# Altium PCB cs301_YourGroupNumber.PcbDoc
Units mm, origin at the board's own origin, x right, y up, seen from the top; angles counter-clockwise.
Board outline 95.58 x 201.78 mm, 2 copper layers (Top Layer, Bottom Layer); 92 components, 65 nets, 307 pads, 58 vias.
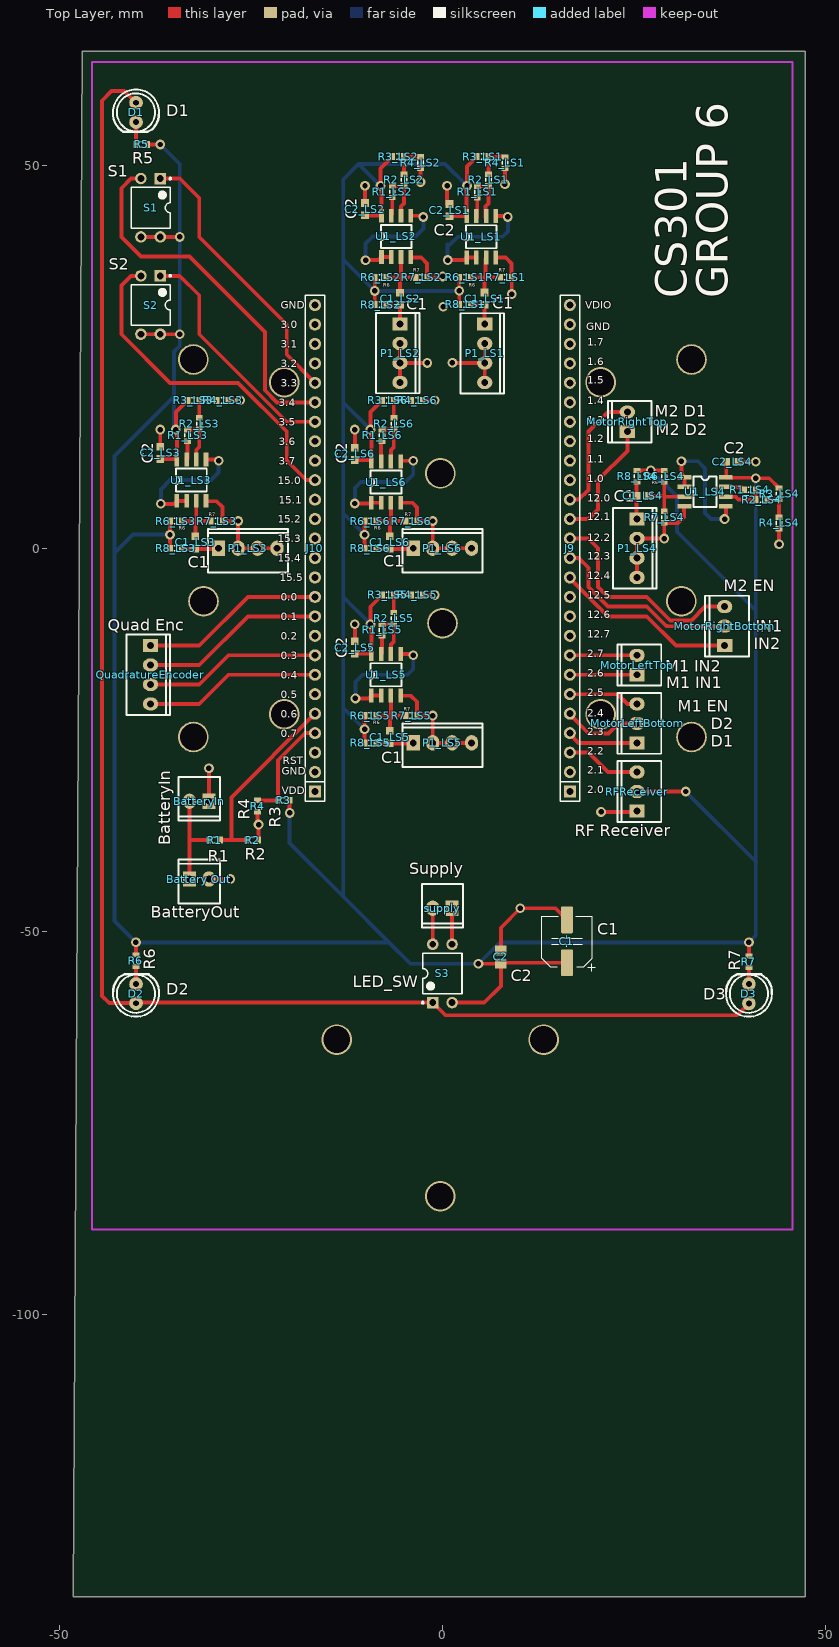
[diagram p0: Top Layer view]
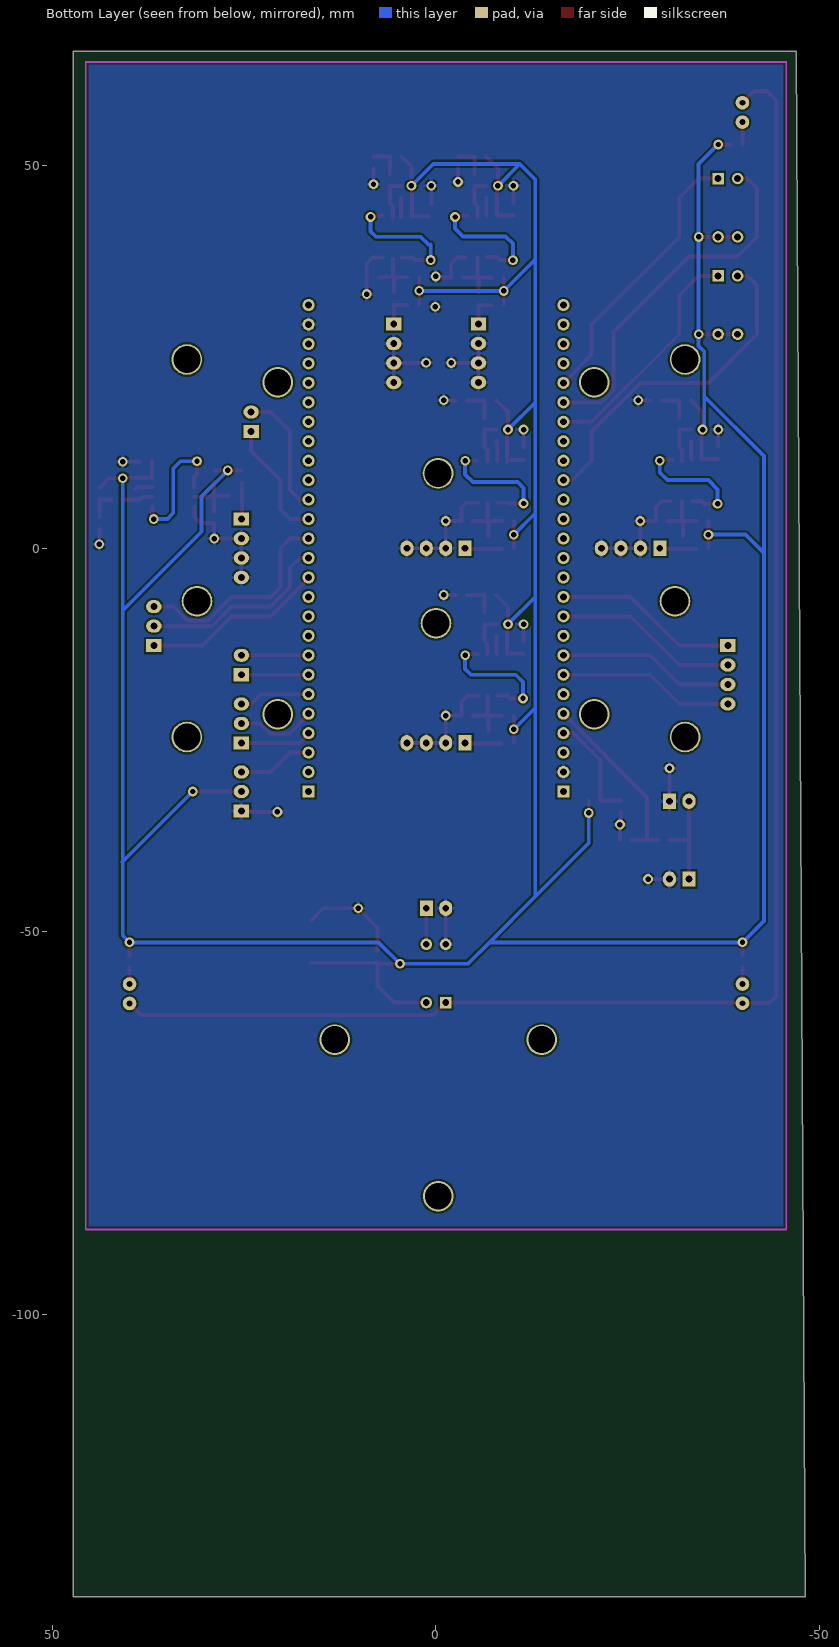
[diagram p1: Bottom Layer view, seen from below]

## Layer stack, top to bottom
Top Solder: solder mask 0.0102, Solder Resist, Dk 3.5
Top Layer: signal copper 0.0356
Dielectric1: dielectric 0.32, FR-4, Dk 4.8
Bottom Layer: signal copper 0.0356
Bottom Solder: solder mask 0.0102, Solder Resist, Dk 3.5

## Board outline
-47.033,64.897 47.371,64.897 47.371,-136.88 27.363,-136.88 -48.214,-136.88

## Design rules (kind name [scope] priority, off if disabled: settings)
Clearance [All] p1: gap=0.254
PolygonConnect [All] p1: connectstyle=Relief reliefconductorwidth=0.508 reliefentries=4 polygonreliefangle="90 Angle" airgapwidth=0.254
RoomDefinition LS6 [InComponentClass('LS6')] p1: confinementstyle=ConfineIn formatcopy=TRUE lockcomponents=FALSE outline 5.461,-3.429 5.461,20.193 -12.319,20.193 -12.319,-3.429
RoomDefinition LS5 [InComponentClass('LS5')] p2: confinementstyle=ConfineIn formatcopy=TRUE lockcomponents=FALSE outline 5.461,-28.829 5.461,-5.207 -12.319,-5.207 -12.319,-28.829
RoomDefinition LS4 [InComponentClass('LS4')] p3: confinementstyle=ConfineIn formatcopy=TRUE lockcomponents=FALSE outline 21.971,-5.461 45.593,-5.461 45.593,12.192 21.971,12.192
RoomDefinition LS3 [InComponentClass('LS3')] p4: confinementstyle=ConfineIn formatcopy=TRUE lockcomponents=FALSE outline -19.939,-3.429 -19.939,20.193 -37.719,20.193 -37.719,-3.429
RoomDefinition LS2 [InComponentClass('LS2')] p5: confinementstyle=ConfineIn formatcopy=TRUE lockcomponents=FALSE outline 0.938,20 0.938,52.004 -11,52.004 -11,20
RoomDefinition LS1 [InComponentClass('LS1')] p6: confinementstyle=ConfineIn formatcopy=TRUE lockcomponents=FALSE outline 9.937,20.008 9.937,52.012 -0.452,52.012 -0.452,20.008
RoomDefinition cs301_YourGroupNumber [InComponentClass('cs301_YourGroupNumber')] p7: confinementstyle=ConfineIn formatcopy=TRUE lockcomponents=FALSE outline -47.625,-91.948 47.371,-91.948 47.371,64.77 -47.625,64.77
RoutingVias [All] p1: holewidth=0.711 width=1.27 viastyle="Through Hole" minholewidth=0.711 minwidth=1.27 maxholewidth=0.711 maxwidth=1.27
SilkToSolderMaskClearance SilkscreenOverComponentPads [IsPad] p1: minsilkscreentomaskgap=0.254 clearancetoexposedcopper=TRUE
SolderMaskExpansion [All] p1: expansion=0.102
UnpouredPolygon [All] p1: allowunpoured=FALSE
Width [All] p1: maxlimit=0.762 minlimit=0.254 preferedwidth=0.254 minimp=50.000000 maximp=50.000000 favimp=50.000000
28 further rules are at their usual default settings.

## Classes and differential pairs
component class LS1: C1_LS1 C2_LS1 P1_LS1 R1_LS1 R2_LS1 R3_LS1 R4_LS1 R6_LS1 R7_LS1 R8_LS1 U1_LS1
component class LS2: C1_LS2 C2_LS2 P1_LS2 R1_LS2 R2_LS2 R3_LS2 R4_LS2 R6_LS2 R7_LS2 R8_LS2 U1_LS2
component class LS3: C1_LS3 C2_LS3 P1_LS3 R1_LS3 R2_LS3 R3_LS3 R4_LS3 R6_LS3 R7_LS3 R8_LS3 U1_LS3
component class LS4: C1_LS4 C2_LS4 P1_LS4 R1_LS4 R2_LS4 R3_LS4 R4_LS4 R6_LS4 R7_LS4 R8_LS4 U1_LS4
component class LS5: C1_LS5 C2_LS5 P1_LS5 R1_LS5 R2_LS5 R3_LS5 R4_LS5 R6_LS5 R7_LS5 R8_LS5 U1_LS5
component class LS6: C1_LS6 C2_LS6 P1_LS6 R1_LS6 R2_LS6 R3_LS6 R4_LS6 R6_LS6 R7_LS6 R8_LS6 U1_LS6
channel class light_sensor: LS1 LS2 LS3 LS4 LS5 LS6

## Components (designator, comment, footprint, x,y, rotation, side; value= is the part's Value field where it differs from the comment)
"Battery Out" "2 Way" ECE-600102STTH -33.02,-43.18 r90 top
BatteryIn "2 Way" ECE-600102STTH -30.48,-33.02 r270 top
C1 "22uF" ECE-CAPAE6.3X5.4SM 16.256,-51.308 r90 top
C1_LS1 "1500pF" ECE-CAPC1608-0603SM 5.492,32.581 r270 top (schematic designator C1)
C1_LS2 "1500pF" ECE-CAPC1608-0603SM -5.539,32.573 r270 top (schematic designator C1)
C1_LS3 "1500pF" ECE-CAPC1608-0603SM -32.258,0.762 r270 top (schematic designator C1)
C1_LS4 "1500pF" ECE-CAPC1608-0603SM 26.162,6.858 r180 top (schematic designator C1)
C1_LS5 "1500pF" ECE-CAPC1608-0603SM -6.858,-24.638 r270 top (schematic designator C1)
C1_LS6 "1500pF" ECE-CAPC1608-0603SM -6.858,0.762 r270 top (schematic designator C1)
C2 "0.1uF" ECE-CAPC2012-0805SM 7.62,-53.34 r90 top
C2_LS1 "100nF" ECE-CAPC1608-0603SM 0.92,44.138 r90 top (schematic designator C2)
C2_LS2 "100nF" ECE-CAPC1608-0603SM -10.111,44.257 r90 top (schematic designator C2)
C2_LS3 "100nF" ECE-CAPC1608-0603SM -36.83,12.446 r90 top (schematic designator C2)
C2_LS4 "100nF" ECE-CAPC1608-0603SM 37.846,11.303 r0 top (schematic designator C2)
C2_LS5 "100nF" ECE-CAPC1608-0603SM -11.43,-12.954 r90 top (schematic designator C2)
C2_LS6 "100nF" ECE-CAPC1608-0603SM -11.43,12.319 r90 top (schematic designator C2)
D1 "LED" LED0.1/5MM#1 -40,55.62 r180 top locked
D2 "LED" LED0.1/5MM#2 -40,-56.88 r0 top locked (schematic designator D4)
D3 "LED" LED0.1/5MM#1 40,-56.88 r0 top locked
J9 "26PIN" SIP26 16.637,-31.75 r90 top locked
J10 "26PIN" SIP26 -16.637,-31.75 r90 top locked
MotorLeftBottom "3 Way" ECE-600103STTH 25.4,-25.4 r180 top
MotorLeftTop "2 Way" ECE-600102STTH 25.4,-16.51 r180 top
MotorRightBottom "3 Way" ECE-600103STTH 36.83,-12.7 r180 top
MotorRightTop "2 Way" ECE-600102STTH 24.13,15.24 r180 top
P1_LS1 "Phototransistor" ECE-600104STTH 5.517,29.254 r0 top (schematic designator P1)
P1_LS2 "Phototransistor" ECE-600104STTH -5.539,29.271 r0 top (schematic designator P1)
P1_LS3 "Phototransistor" ECE-600104STTH -29.21,0 r90 top (schematic designator P1)
P1_LS4 "Phototransistor" ECE-600104STTH 25.4,3.81 r0 top (schematic designator P1)
P1_LS5 "Phototransistor" ECE-600104STTH -3.81,-25.4 r90 top (schematic designator P1)
P1_LS6 "Phototransistor" ECE-600104STTH -3.81,0 r90 top (schematic designator P1)
QuadratureEncoder "4 Way" ECE-600104STTH -38.1,-12.7 r0 top
R1 "100k" J1-0603 -29.718,-38.1 r180 top
R1_LS1 "100k" J1-0603 4.548,46.503 r90 top (schematic designator R1)
R1_LS2 "100k" J1-0603 -6.555,46.543 r90 top (schematic designator R1)
R1_LS3 "100k" J1-0603 -33.274,14.732 r90 top (schematic designator R1)
R1_LS4 "100k" J1-0603 40.132,7.632 r0 top (schematic designator R1)
R1_LS5 "100k" J1-0603 -7.874,-10.668 r90 top (schematic designator R1)
R1_LS6 "100k" J1-0603 -7.874,14.732 r90 top (schematic designator R1)
R2 "100k" J1-0603 -24.765,-38.1 r180 top
R2_LS1 "100k" J1-0603 6,48.087 r90 top (schematic designator R2)
R2_LS2 "100k" J1-0603 -5.031,48.079 r90 top (schematic designator R2)
R2_LS3 "100k" J1-0603 -31.75,16.268 r90 top (schematic designator R2)
R2_LS4 "100k" J1-0603 41.668,6.35 r0 top (schematic designator R2)
R2_LS5 "100k" J1-0603 -6.35,-9.132 r90 top (schematic designator R2)
R2_LS6 "100k" J1-0603 -6.35,16.268 r90 top (schematic designator R2)
R3 "100k" J1-0603 -20.701,-32.893 r0 top
R3_LS1 "100k" J1-0603 5.238,51.123 r180 top (schematic designator R3)
R3_LS2 "100k" J1-0603 -5.793,51.115 r180 top (schematic designator R3)
R3_LS3 "100k" J1-0603 -32.512,19.304 r180 top (schematic designator R3)
R3_LS4 "100k" J1-0603 43.942,7.112 r90 top (schematic designator R3)
R3_LS5 "100k" J1-0603 -7.112,-6.096 r180 top (schematic designator R3)
R3_LS6 "100k" J1-0603 -7.112,19.304 r180 top (schematic designator R3)
R4 "100k" J1-0603 -24.13,-33.655 r90 top
R4_LS1 "100k" J1-0603 8.159,50.323 r90 top (schematic designator R4)
R4_LS2 "100k" J1-0603 -2.872,50.353 r90 top (schematic designator R4)
R4_LS3 "100k" J1-0603 -28.702,19.304 r180 top (schematic designator R4)
R4_LS4 "100k" J1-0603 43.942,3.302 r90 top (schematic designator R4)
R4_LS5 "100k" J1-0603 -3.302,-6.096 r180 top (schematic designator R4)
R4_LS6 "100k" J1-0603 -3.302,19.304 r180 top (schematic designator R4)
R5 "1" J1-0603 -39.243,52.705 r0 top
R6 "1" J1-0603 -40.005,-53.848 r90 top
R6_LS1 "1M" J1-0603 2.952,35.375 r180 top (schematic designator R6)
R6_LS2 "1M" J1-0603 -8.079,35.367 r180 top (schematic designator R6)
R6_LS3 "1M" J1-0603 -34.798,3.556 r180 top (schematic designator R6)
R6_LS4 "1M" J1-0603 28.956,9.398 r90 top (schematic designator R6)
R6_LS5 "1M" J1-0603 -9.398,-21.844 r180 top (schematic designator R6)
R6_LS6 "1M" J1-0603 -9.398,3.556 r180 top (schematic designator R6)
R7 "1" J1-0603 40.005,-53.975 r90 top
R7_LS1 "1M" J1-0603 8.286,35.375 r180 top (schematic designator R7)
R7_LS2 "1M" J1-0603 -2.745,35.367 r180 top (schematic designator R7)
R7_LS3 "1M" J1-0603 -29.464,3.556 r180 top (schematic designator R7)
R7_LS4 "1M" J1-0603 28.956,4.064 r90 top (schematic designator R7)
R7_LS5 "1M" J1-0603 -4.064,-21.844 r180 top (schematic designator R7)
R7_LS6 "1M" J1-0603 -4.064,3.556 r180 top (schematic designator R7)
R8_LS1 "100k" J1-0603 2.952,31.819 r180 top (schematic designator R8)
R8_LS2 "100k" J1-0603 -8.079,31.811 r180 top (schematic designator R8)
R8_LS3 "100k" J1-0603 -34.798,0 r180 top (schematic designator R8)
R8_LS4 "100k" J1-0603 25.4,9.398 r90 top (schematic designator R8)
R8_LS5 "100k" J1-0603 -9.398,-25.4 r180 top (schematic designator R8)
R8_LS6 "100k" J1-0603 -9.398,0 r180 top (schematic designator R8)
RFReceiver "3 Way" ECE-600103STTH 25.4,-34.29 r180 top
S1 "SW DIP-2" DIP-4 -38.1,44.45 r270 top
S2 "SW DIP-2" DIP-4 -38.1,31.75 r270 top
S3 "SW DIP-2" DIP-4 0,-55.5 r90 top
supply "2 Way" ECE-600102STTH 1.27,-46.99 r270 top
U1_LS1 "60MHz Opamp" SO-8 5.056,40.661 r90 top (schematic designator U1)
U1_LS2 "60MHz Opamp" SO-8 -6.047,40.701 r90 top (schematic designator U1)
U1_LS3 "60MHz Opamp" SO-8 -32.766,8.89 r90 top (schematic designator U1)
U1_LS4 "60MHz Opamp" SO-8 34.29,7.378 r0 top (schematic designator U1)
U1_LS5 "60MHz Opamp" SO-8 -7.366,-16.51 r90 top (schematic designator U1)
U1_LS6 "60MHz Opamp" SO-8 -7.366,8.636 r90 top (schematic designator U1)

## Footprints (in the part's own frame and the unit in brackets; to place one, negate y for a bottom-side part, rotate by r counter-clockwise, add the part's x,y. Pads: shape width x height; smd on the part's side, far side on the other; paste and mask are expansions set on the pad)
DIP-4 [mm] "DIP; 4 Leads; Row Spacing 7.62 mm; Pitch 2.54 mm"
  rect 1.5x1.5 hole 0.9: 1(-3.81,1.27)
  round 1.5 hole 0.9: 2(-3.81,-1.27) 3(3.81,-1.27) 4(3.81,1.27)
  silkscreen extent -3.93,-2.55 2.65,2.7, body extent -3.15,-2.5 3.15,2.5, height 5.6
ECE-600102STTH [mm] "Polarised Header 2 way"
  rect 2x1.7 hole 0.9: 1(0,0)
  oval 2x1.7 hole 0.9: 2(0,-2.54)
  silkscreen extent -3.16,-3.96 2.54,1.42, body extent -3.3,-3.64 3.17,1.44, height 7.39
ECE-600103STTH [mm] "Polarised Header 3 way"
  rect 2x1.7 hole 0.9: 1(0,0)
  oval 2x1.7 hole 0.9: 2(0,-2.54) 3(0,-5.08)
  silkscreen extent -3.16,-6.5 2.54,1.42
ECE-600104STTH [mm] "Polarised Header 4 way"
  rect 2x1.7 hole 0.9: 1(0,0)
  oval 2x1.7 hole 0.9: 2(0,-2.54) 3(0,-5.08) 4(0,-7.62)
  silkscreen extent -3.16,-9.04 2.54,1.42
ECE-CAPAE6.3X5.4SM [mm] "Capacitor, polarized, aluminum can; 6.3x5.4mm DxH"
  round 0.508 on Mech15: 0(0,0)
  rrect25% 3.5x1.6 smd: 1(-2.8,0) 2(2.8,0)
  silkscreen extent -3.9,-3.7 3.3,3.3, body extent -3.3,-3.3 3.3,3.3, height 4.23
ECE-CAPC1608-0603SM [mm] "Chip Capacitor, Body 1.6x0.8mm, IPC Medium Density"
  rect 1x1 smd: 1(-0.8,0) 2(0.8,0)
  body extent -0.87,-0.48 0.87,0.48, height 0.85
ECE-CAPC2012-0805SM [mm] "Chip Capacitor, Body 2.0x1.3mm, IPC Medium Density"
  rect 1.3x1.5 smd: 1(-0.85,0) 2(0.85,0)
  body extent -1.1,-0.72 1.1,0.72, height 1.1
J1-0603 [mm] "Chip Resistor, Body 1.6x0.8mm, IPC High Density"
  rect 0.7x0.9 smd: 1(-0.75,0) 2(0.75,0)
  silkscreen extent -0.2,-0.35 0.2,0.35, body extent -0.85,-0.48 0.85,0.48, height 0.9
LED0.1/5MM#1 [mil]
  round 70 hole 30: A(0,0) K(0,-100)
  silkscreen extent -118,-168 118,50
LED0.1/5MM#2 [mil]
  round 70 hole 30: A(0,0) K(0,-98.42)
  silkscreen extent -118,-168 118,50
SIP26 [mil]
  rect 62x62 hole 35.43: 1(0,0)
  round 62 hole 35.43: 2(100,0) 3(200,0) 4(300,0) 5(400,0) 6(500,0) 7(600,0) 8(700,0) 9(800,0) 10(900,0) 11(1000,0) 12(1100,0) 13(1200,0) 14(1300,0) 15(1400,0) 16(1500,0) 17(1600,0) 18(1700,0) 19(1800,0) 20(1900,0) 21(2000,0) 22(2100,0) 23(2200,0) 24(2300,0) 25(2400,0) 26(2500,0)
  silkscreen extent -50,-50 2550,50
SO-8 [mm]
  rect 1.8x0.6 smd: 1(-2.7,1.905) 2(-2.7,0.635) 3(-2.7,-0.635) 4(-2.7,-1.905) 5(2.7,-1.905) 6(2.7,-0.635) 7(2.7,0.635) 8(2.7,1.905)
  silkscreen extent -1.5,-2 1.5,2, body extent -2,-2.5 2,2.5, height 1.8

## Part data
"Battery Out" BatteryIn MotorLeftTop MotorRightTop supply: library part CON000001, "HEADER POLARISED 2WAY TH"
C1: library part "CAP 22uF/35V SM", "Polarized Capacitor (Radial)"
C1_LS1 C1_LS2 C1_LS3 C1_LS4 C1_LS5 C1_LS6: library part CAP000613, "CAP CER 1500pF 50V X7R SM0603"
C2: library part "CAP 0805 SM", "Capacitor"
C2_LS1 C2_LS2 C2_LS3 C2_LS4 C2_LS5 C2_LS6: library part CAP000624, "CAP CER 100nF 25V X7R SM0603"
MotorLeftBottom MotorRightBottom RFReceiver: library part CON000002, "HEADER POLARISED 3WAY TH"
P1_LS1 P1_LS2 P1_LS3 P1_LS4 P1_LS5 P1_LS6 QuadratureEncoder: library part CON000003, "HEADER POLARISED 4WAY TH"
R1 R1_LS1 R1_LS2 R1_LS3 R1_LS4 R1_LS5 R1_LS6 R2 R2_LS1 R2_LS2 R2_LS3 R2_LS4 R2_LS5 R2_LS6 R3 R3_LS1 R3_LS2 R3_LS3 R3_LS4 R3_LS5 R3_LS6 R4 R4_LS1 R4_LS2 R4_LS3 R4_LS4 R4_LS5 R4_LS6 R5 R6 R6_LS1 R6_LS2 R6_LS3 R6_LS4 R6_LS5 R6_LS6 R7 R7_LS1 R7_LS2 R7_LS3 R7_LS4 R7_LS5 R7_LS6 R8_LS1 R8_LS2 R8_LS3 R8_LS4 R8_LS5 R8_LS6: library part Res3, "Resistor"
S1 S2 S3: "DIP Switch, 2 Position, SPST"
U1_LS1 U1_LS2 U1_LS3 U1_LS4 U1_LS5 U1_LS6: library part LT6221

## Free pads (board coordinates)
  round 4 hole 3.5 unplated: 0(-32.512,-24.638) 0(-32.512,24.638) 0(-31.191,-6.909) 0(-0.27,9.779) 0(0,-9.779) 0(31.191,-6.909) 0(32.512,-24.638) 0(32.512,24.638) 1(-20.65,-21.666) 1(-20.65,21.666) 1(20.65,-21.666) 1(20.65,21.666)
  round 4 hole 3.5: 0(-13.792,-64.135) 0(13.208,-64.135) 1(-0.292,-84.582)

## Via types
v1: diameter 1.27, hole 0.711, Top Layer to Bottom Layer, 58 vias

## Nets (pads, with @x,y where several pads share a name; then routed paths per layer and width w, separated by ;. In a path a pad name is that pad's centre, name@x,y a point inside that pad or via, vN(x,y) a via of type N, cw(c..) or ccw(c..) an arc to the next point about the centre after c; other vN are vias at no path point)
GND: "Battery Out.2" BatteryIn.1 C1.2 C2.2 C2_LS1.2 C2_LS2.2 C2_LS3.2 C2_LS4.2 C2_LS5.2 C2_LS6.2 J9.25 J10.2 P1_LS1.2 P1_LS1.3 P1_LS1.4 P1_LS2.2 P1_LS2.3 P1_LS2.4 P1_LS3.2 P1_LS3.3 P1_LS3.4 P1_LS4.2 P1_LS4.3 P1_LS4.4 P1_LS5.2 P1_LS5.3 P1_LS5.4 P1_LS6.2 P1_LS6.3 P1_LS6.4 R2.1 R4.1 R4_LS1.1 R4_LS2.1 R4_LS3.1 R4_LS4.1 R4_LS5.1 R4_LS6.1 R7_LS1.1 R7_LS2.1 R7_LS3.1 R7_LS4.1 R7_LS5.1 R7_LS6.1 RFReceiver.1 S3.4 supply.2 U1_LS1.4 U1_LS2.4 U1_LS3.4 U1_LS4.4 U1_LS5.4 U1_LS6.4 | length 147.6
  Top Layer w0.508: C2_LS3.2 v1(-36.83,15.494) ; U1_LS3.4@-30.607,6.142 -29.486,6.142 -28.714,5.37 R7_LS3.1 v1(-26.67,3.556) P1_LS3.2 P1_LS3.4 ; -30.48,-43.18 v1(-27.686,-43.18) ; BatteryIn.1 v1(-30.48,-28.702) ; R4_LS3.1 v1(-26.416,19.304) ; R4.1 -24.13,-35.941 -24.015,-36.056 R2.1 ; C2_LS5.2 v1(-11.43,-9.906) ; C2_LS6.2 v1(-11.43,15.494) ; C2_LS2.2 v1(-10.111,47.305) ; P1_LS2.4 P1_LS2.3 ; P1_LS2.2 P1_LS2.3 ; U1_LS5.4@-5.461,-19.258 -4.086,-19.258 -3.314,-20.03 R7_LS5.1 v1(-1.27,-21.844) P1_LS5.2 P1_LS5.4 ; U1_LS6.4 -3.904,5.936 -3.314,5.346 R7_LS6.1 v1(-1.27,3.556) P1_LS6.2 P1_LS6.3 P1_LS6.4 ; U1_LS2.4@-3.888,37.953 -2.767,37.953 -1.995,37.181 R7_LS2.1 v1@0.049,35.367 ; v1(-2.872,47.813) R4_LS2.1 ; R4_LS5.1 v1(-1.016,-6.096) ; R4_LS6.1 v1(-1.016,19.304) ; v1(-1.983,24.191) P1_LS2.3 ; S3.4 supply.2 ; C2_LS1.2@0.608,44.938 v1(0.608,47.313) ; v1@1.326,24.174 P1_LS1.3 ; P1_LS1.4 P1_LS1.3 ; P1_LS1.2 P1_LS1.3 ; U1_LS1.4 8.264,37.961 9.036,37.189 R7_LS1.1 9.048,35.363 v1(9.048,33.178) ; C2.2 7.62,-49.53 v1(10.16,-46.99) 14.738,-46.99 C1.2 ; v1(8.159,47.529) R4_LS1.1 ; v1(20.701,-34.417) RFReceiver.1@25.4,-34.417 ; P1_LS4.4 P1_LS4.2 v1(28.956,1.27) R7_LS4.1 30.77,3.314 31.542,4.086 U1_LS4.4@31.542,5.473 ; C2_LS4.2 v1(40.894,11.303) ; v1(43.942,0.508) R4_LS4.1
  other v1: -24.003,-36.068 1.301,24.199 0.1,31.527 0.041,35.48
NetBatteryIn_2: "Battery Out.1" BatteryIn.2 R1.2 | length 12.7
  Top Layer w0.508: -33.02,-43.18 -33.02,-38.1 ; BatteryIn.2 -33.02,-38.1 ; R1.2 -33.02,-38.1
NetC1_LS1_1: C1_LS1.1 R6_LS1.1 R7_LS1.2 U1_LS1.3 | length 8.2
  Top Layer w0.508: R6_LS1.1@3.714,35.375 5.492,35.375 ; C1_LS1.1@5.492,33.431 5.492,35.375 ; U1_LS1.3@5.619,37.755 5.619,35.502 5.492,35.375 ; R7_LS1.2 5.492,35.375
NetC1_LS1_2: C1_LS1.2 P1_LS1.1 R8_LS1.1 | length 4.2
  Top Layer w0.508: R8_LS1.1@3.79,31.731 C1_LS1.2@5.492,31.731 ; P1_LS1.1@5.492,29.279 C1_LS1.2@5.492,31.731 ; C1_LS1.2 C1_LS1.2@5.492,31.731
NetC1_LS2_1: C1_LS2.1 R6_LS2.1 R7_LS2.2 U1_LS2.3 | length 8.5
  Top Layer w0.508: R6_LS2.1@-7.317,35.367 -5.539,35.367 ; C1_LS2.1@-5.539,33.423 -5.539,35.367 ; U1_LS2.3 -5.412,35.494 -5.539,35.367 ; R7_LS2.2 -5.539,35.367
NetC1_LS2_2: C1_LS2.2 P1_LS2.1 R8_LS2.1 | length 4.2
  Top Layer w0.508: R8_LS2.1@-7.241,31.723 C1_LS2.2@-5.539,31.723 ; P1_LS2.1 C1_LS2.2@-5.539,31.723 ; C1_LS2.2 C1_LS2.2@-5.539,31.723
NetC1_LS3_1: C1_LS3.1 R6_LS3.1 R7_LS3.2 U1_LS3.3 | length 8.5
  Top Layer w0.508: R6_LS3.1@-34.036,3.556 -32.258,3.556 ; C1_LS3.1@-32.258,1.612 -32.258,3.556 ; U1_LS3.3 -32.131,3.683 -32.258,3.556 ; R7_LS3.2 -32.258,3.556
NetC1_LS3_2: C1_LS3.2 P1_LS3.1 R8_LS3.1 | length 4.8
  Top Layer w0.508: R8_LS3.1@-33.96,-0.088 -32.258,-0.088 -29.298,-0.088 P1_LS3.1
NetC1_LS4_1: C1_LS4.1 R6_LS4.1 R7_LS4.2 U1_LS4.3 | length 8.5
  Top Layer w0.508: C1_LS4.1@27.012,6.858 28.956,6.858 ; R7_LS4.2 28.956,6.858 ; R6_LS4.1@28.956,8.636 28.956,6.858 ; U1_LS4.3@31.59,6.731 29.083,6.731 28.956,6.858
NetC1_LS4_2: C1_LS4.2 P1_LS4.1 R8_LS4.1 | length 4.8
  Top Layer w0.508: R8_LS4.1@25.312,8.56 25.312,6.858 25.312,3.898 P1_LS4.1
NetC1_LS5_1: C1_LS5.1 R6_LS5.1 R7_LS5.2 U1_LS5.3 | length 8.5
  Top Layer w0.508: R6_LS5.1@-8.636,-21.844 -6.858,-21.844 ; C1_LS5.1@-6.858,-23.788 -6.858,-21.844 ; U1_LS5.3 -6.731,-21.717 -6.858,-21.844 ; R7_LS5.2 -6.858,-21.844
NetC1_LS5_2: C1_LS5.2 P1_LS5.1 R8_LS5.1 | length 4.8
  Top Layer w0.508: R8_LS5.1@-8.56,-25.488 -6.858,-25.488 -3.898,-25.488 P1_LS5.1
NetC1_LS6_1: C1_LS6.1 R6_LS6.1 R7_LS6.2 U1_LS6.3 | length 8.2
  Top Layer w0.508: R6_LS6.1@-8.636,3.556 -6.858,3.556 ; C1_LS6.1@-6.858,1.612 -6.858,3.556 ; U1_LS6.3 -6.731,3.683 -6.858,3.556 ; R7_LS6.2 -6.858,3.556
NetC1_LS6_2: C1_LS6.2 P1_LS6.1 R8_LS6.1 | length 4.8
  Top Layer w0.508: R8_LS6.1@-8.56,-0.088 -6.858,-0.088 -3.898,-0.088 P1_LS6.1
NetD1_A: D1.A R5.1 | length 2.9
  Top Layer w0.508: R5.1@-40,52.712 D1.A
NetD1_K: D1.K D2.K D3.K S3.1 | length 208.5
  Top Layer w0.508: D2.K -43.49,-59.38 -44.45,-58.42 -44.45,58.42 -43.18,59.69 -41.53,59.69 D1.K ; D2.K@-39.93,-59.31 S3.1 0.38,-60.96 38.46,-60.96 D3.K
NetD2_A: D2.A R6.1 | length 2.3
  Top Layer w0.508: D2.A@-40.005,-56.875 R6.1
NetD3_A: D3.A R7.1 | length 2.2
  Top Layer w0.508: D3.A R7.1@40,-54.73
NetJ9_3: J9.3 RFReceiver.3 | length 9.8
  Top Layer w0.508: J9.3 19.05,-26.67 21.59,-29.21 RFReceiver.3
NetJ9_4: J9.4 MotorLeftBottom.1 | length 9.4
  Top Layer w0.508: J9.4 16.637,-24.257 17.78,-25.4 MotorLeftBottom.1
NetJ9_5: J9.5 MotorLeftBottom.2 | length 10.5
  Top Layer w0.508: J9.5 16.637,-21.717 19.094,-24.174 21.689,-24.174 23.003,-22.86 MotorLeftBottom.2
NetJ9_6: J9.6 MotorLeftBottom.3 | length 9.3
  Top Layer w0.508: J9.6 22.86,-19.05 24.13,-20.32 MotorLeftBottom.3
NetJ9_7: J9.7 MotorLeftTop.1 | length 8.8
  Top Layer w0.508: J9.7 MotorLeftTop.1
NetJ9_8: J9.8 MotorLeftTop.2 | length 8.8
  Top Layer w0.508: J9.8 MotorLeftTop.2
NetJ9_12: J9.12 MotorRightBottom.1 | length 23.9
  Top Layer w0.508: J9.12 16.637,-3.937 21.59,-8.89 26.67,-8.89 30.48,-12.7 MotorRightBottom.1
NetJ9_13: J9.13 MotorRightBottom.2 | length 25.4
  Top Layer w0.508: J9.13 17.78,-1.27 19.05,-2.54 19.05,-5.08 21.59,-7.62 26.67,-7.62 29.21,-10.16 29.402,-10.16 29.421,-10.179 36.83,-10.179 MotorRightBottom.2
NetJ9_14: J9.14 MotorRightBottom.3 | length 28.3
  Top Layer w0.508: J9.14 19.05,1.27 20.32,0 20.32,-5.08 21.59,-6.35 26.67,-6.35 29.737,-9.417 32.493,-9.417 34.29,-7.62 MotorRightBottom.3
NetJ9_15: J9.15 MotorRightTop.1 | length 15.9
  Top Layer w0.508: J9.15 19.05,3.81 20.32,5.08 20.32,8.89 24.13,12.7 MotorRightTop.1
NetJ9_16: J9.16 MotorRightTop.2 | length 16.7
  Top Layer w0.508: J9.16 17.78,6.35 19.05,7.62 19.05,15.24 21.59,17.78 MotorRightTop.2
NetJ10_4: J10.4 R3.1 R4.2 | length 14.2
  Top Layer w0.508: R4.2 R3.1@-21.463,-32.905 ; R3.1 -21.451,-27.674 -17.907,-24.13 J10.4
NetJ10_5: J10.5 R1.1 R2.2 | length 24.5
  Top Layer w0.508: R1.1 R2.2 ; -27.559,-38.1 -27.559,-32.512 J10.5
NetJ10_7: J10.7 QuadratureEncoder.4 | length 23
  Top Layer w0.508: QuadratureEncoder.4 -31.75,-20.32 -27.94,-16.51 J10.7
NetJ10_8: J10.8 QuadratureEncoder.3 | length 23
  Top Layer w0.508: QuadratureEncoder.3 -31.75,-17.78 -27.94,-13.97 J10.8
NetJ10_10: J10.10 QuadratureEncoder.2 | length 24.1
  Top Layer w0.508: QuadratureEncoder.2 -31.75,-15.24 -25.4,-8.89 J10.10
NetJ10_11: J10.11 QuadratureEncoder.1 | length 24.1
  Top Layer w0.508: QuadratureEncoder.1 -31.75,-12.7 -25.4,-6.35 J10.11
NetJ10_17: J10.17 S2.2 | length 44.8
  Top Layer w0.508: S2.2 -40.64,35.56 -41.91,34.29 -41.91,27.94 -35.56,21.59 -26.67,21.59 -20.32,15.24 -20.32,11.43 -17.78,8.89 J10.17
NetJ10_20: J10.20 S2.1 | length 31.1
  Top Layer w0.508: S2.1 -34.29,35.56 -31.75,33.02 -31.75,27.94 -20.32,16.51 J10.20
NetJ10_21: J10.21 S1.2 | length 48.1
  Top Layer w0.508: S1.2 -40.64,48.26 -41.91,46.99 -41.91,40.64 -39.37,38.1 -33.02,38.1 -23.158,28.238 -23.158,20.627 -21.581,19.05 J10.21
NetJ10_22: J10.22 S1.1 | length 36.5
  Top Layer w0.508: S1.1 -34.29,48.26 -31.75,45.72 -31.75,40.64 -20.32,29.21 -20.32,25.273 J10.22
NetR1_LS1_1: R1_LS1.1 U1_LS1.7 | length 2.6
  Top Layer w0.508: U1_LS1.7@4.548,43.201 R1_LS1.1
NetR1_LS1_2: R1_LS1.2 R2_LS1.1 U1_LS1.6 | length 5.9
  Top Layer w0.508: R1_LS1.2@4.476,47.301 5.964,47.301 R2_LS1.1 6,45.027 5.619,44.646 U1_LS1.6@5.619,43.155
NetR1_LS2_1: R1_LS2.1 U1_LS2.7 | length 2.4
  Top Layer w0.508: U1_LS2.7 -6.555,43.528 R1_LS2.1
NetR1_LS2_2: R1_LS2.2 R2_LS2.1 U1_LS2.6 | length 5.9
  Top Layer w0.508: R1_LS2.2 -5.067,47.293 R2_LS2.1 -5.031,45.019 -5.412,44.638 U1_LS2.6@-5.412,43.147
NetR1_LS3_1: R1_LS3.1 U1_LS3.7 | length 2.4
  Top Layer w0.508: U1_LS3.7 -33.274,11.717 R1_LS3.1
NetR1_LS3_2: R1_LS3.2 R2_LS3.1 U1_LS3.6 | length 5.9
  Top Layer w0.508: R1_LS3.2 -31.786,15.482 R2_LS3.1 -31.75,13.208 -32.131,12.827 U1_LS3.6@-32.131,11.336
NetR1_LS4_1: R1_LS4.1 U1_LS4.7 | length 2.5
  Top Layer w0.508: U1_LS4.7 39.001,8.013 R1_LS4.1
NetR1_LS4_2: R1_LS4.2 R2_LS4.1 U1_LS4.6 | length 5.4
  Top Layer w0.508: U1_LS4.6@36.99,6.731 38.227,6.731 38.608,6.35 R2_LS4.1 40.882,6.386 R1_LS4.2
NetR1_LS5_1: R1_LS5.1 U1_LS5.7 | length 2.4
  Top Layer w0.508: U1_LS5.7 -7.874,-13.683 R1_LS5.1
NetR1_LS5_2: R1_LS5.2 R2_LS5.1 U1_LS5.6 | length 5.6
  Top Layer w0.508: R1_LS5.2 -6.386,-9.918 R2_LS5.1 -6.35,-12.192 -6.731,-12.573 U1_LS5.6
NetR1_LS6_1: R1_LS6.1 U1_LS6.7 | length 2.7
  Top Layer w0.508: U1_LS6.7 -8.001,13.855 R1_LS6.1
NetR1_LS6_2: R1_LS6.2 R2_LS6.1 U1_LS6.6 | length 5.9
  Top Layer w0.508: R1_LS6.2 -6.386,15.482 R2_LS6.1 -6.35,13.208 -6.731,12.827 U1_LS6.6
NetR2_LS1_2: R2_LS1.2 R3_LS1.1 R4_LS1.2 | length 4.4
  Top Layer w0.508: R3_LS1.1@5.988,51.123 R4_LS1.2@8.159,51.123 ; R2_LS1.2 R3_LS1.1@6,51.111
NetR2_LS2_2: R2_LS2.2 R3_LS2.1 R4_LS2.2 | length 4.4
  Top Layer w0.508: R3_LS2.1 R4_LS2.2@-2.872,51.115 ; R2_LS2.2 R3_LS2.1@-5.031,51.103
NetR2_LS3_2: R2_LS3.2 R3_LS3.1 R4_LS3.2 | length 4.6
  Top Layer w0.508: R3_LS3.1 R4_LS3.2 ; R2_LS3.2 R3_LS3.1@-31.75,19.292
NetR2_LS4_2: R2_LS4.2 R3_LS4.1 R4_LS4.2 | length 3.8
  Top Layer w0.508: R2_LS4.2 R3_LS4.1@43.942,6.35 ; R4_LS4.2 R3_LS4.1@43.942,6.35 ; R3_LS4.1 R3_LS4.1@43.942,6.35
NetR2_LS5_2: R2_LS5.2 R3_LS5.1 R4_LS5.2 | length 4.6
  Top Layer w0.508: R3_LS5.1 R4_LS5.2 ; R2_LS5.2 R3_LS5.1@-6.35,-6.108
NetR2_LS6_2: R2_LS6.2 R3_LS6.1 R4_LS6.2 | length 4.6
  Top Layer w0.508: R3_LS6.1 R4_LS6.2 ; R2_LS6.2 R3_LS6.1@-6.35,19.292
NetS3_3: S3.3 supply.1 | length 4.7
  Top Layer w0.508: S3.3 supply.1
NetU1_LS1_1: U1_LS1.1 U1_LS1.2 U1_LS1.5 | length 17.4
  Top Layer w0.508: v1@0.992,37.613 2.803,37.613 U1_LS1.1 U1_LS1.2 ; U1_LS1.5 8.428,43.361 v1(8.54,43.249)
  Bottom Layer w0.508: v1(0.68,37.613) 0.68,39.645 ; 0.992,39.645 2.008,40.661 7.85,40.661 8.54,41.351 v1(8.54,43.249)
NetU1_LS2_1: U1_LS2.1 U1_LS2.2 U1_LS2.5 | length 17
  Top Layer w0.508: v1(-10.039,37.605) -8.348,37.605 U1_LS2.1 ; U1_LS2.1@-7.698,38.001 U1_LS2.2 ; U1_LS2.5 -2.651,43.401 v1(-2.491,43.241)
  Bottom Layer w0.508: v1(-10.039,37.605) -10.039,39.757 -9.095,40.701 -3.507,40.701 -2.491,41.717 v1(-2.491,43.241)
NetU1_LS3_1: U1_LS3.1 U1_LS3.2 U1_LS3.5 | length 17.1
  Top Layer w0.508: v1(-36.758,5.794) -35.067,5.794 U1_LS3.1 U1_LS3.2 ; U1_LS3.5 -29.37,11.59 v1(-29.21,11.43)
  Bottom Layer w0.508: v1(-36.758,5.794) -36.758,7.692 -35.56,8.89 -30.226,8.89 -29.21,9.906 v1(-29.21,11.43)
NetU1_LS4_1: U1_LS4.1 U1_LS4.2 U1_LS4.5 | length 17.4
  Top Layer w0.508: v1(31.194,11.358) 31.194,9.679 U1_LS4.1 U1_LS4.2 ; v1(36.83,3.81) 36.99,3.97 U1_LS4.5
  Bottom Layer w0.508: v1(31.194,11.358) 33.358,11.358 34.29,10.426 34.29,4.584 35.064,3.81 v1(36.83,3.81)
NetU1_LS5_1: U1_LS5.1 U1_LS5.2 U1_LS5.5 | length 17.4
  Top Layer w0.508: v1(-11.358,-19.606) -9.667,-19.606 U1_LS5.1 U1_LS5.2 ; U1_LS5.5 -3.97,-13.81 v1(-3.81,-13.97)
  Bottom Layer w0.508: v1(-11.358,-19.606) -11.358,-17.454 -10.414,-16.51 -4.572,-16.51 -3.81,-15.748 v1(-3.81,-13.97)
NetU1_LS6_1: U1_LS6.1 U1_LS6.2 U1_LS6.5 | length 17.2
  Top Layer w0.508: v1(-11.43,5.842) -9.365,5.842 U1_LS6.1 U1_LS6.2 ; U1_LS6.5@-5.367,11.43 v1(-3.81,11.43)
  Bottom Layer w0.508: v1(-11.43,5.842) -11.43,7.874 -10.668,8.636 -4.826,8.636 -3.81,9.652 v1(-3.81,11.43)
VCC: C1.1 C2.1 C2_LS1.1 C2_LS2.1 C2_LS3.1 C2_LS4.1 C2_LS5.1 C2_LS6.1 R3.2 R3_LS1.2 R3_LS2.2 R3_LS3.2 R3_LS4.2 R3_LS5.2 R3_LS6.2 R5.2 R6.2 R6_LS1.2 R6_LS2.2 R6_LS3.2 R6_LS4.2 R6_LS5.2 R6_LS6.2 R7.2 R8_LS1.2 R8_LS2.2 R8_LS3.2 R8_LS4.2 R8_LS5.2 R8_LS6.2 RFReceiver.2 S1.3 S1.4 S2.3 S2.4 S3.2 U1_LS1.8 U1_LS2.8 U1_LS3.8 U1_LS4.8 U1_LS5.8 U1_LS6.8 | length 604.4
  Top Layer w0.508: R6.2 v1(-40.005,-51.435) ; S2.3 S2.4 v1(-34.29,27.94) ; S1.3 S1.4 v1(-34.29,40.64) ; R5.2 v1(-36.83,52.705) ; C2_LS3.1 -34.727,11.646 U1_LS3.8 -34.671,15.367 v1(-34.798,15.494) -34.798,17.768 R3_LS3.2 ; R8_LS3.2@-35.56,0.012 v1(-35.56,1.778) R6_LS3.2@-35.56,3.544 ; v1(-19.939,-34.544) R3.2@-19.939,-32.905 ; C2_LS5.1 -9.327,-13.754 U1_LS5.8 -9.271,-10.033 v1(-9.398,-9.906) -9.398,-7.632 R3_LS5.2 ; C2_LS6.1 -9.454,11.519 U1_LS6.8 -9.271,15.367 v1(-9.398,15.494) -9.398,17.768 R3_LS6.2 ; R8_LS5.2@-10.16,-25.388 v1(-10.16,-23.622) R6_LS5.2@-10.16,-21.856 ; R8_LS6.2@-10.16,0.012 v1(-10.16,1.778) R6_LS6.2@-10.16,3.544 ; C2_LS2.1 -8.008,43.457 U1_LS2.8 -7.952,47.178 v1(-8.079,47.305) -8.079,49.579 R3_LS2.2 ; R8_LS2.2@-8.841,31.823 v1(-8.841,33.589) R6_LS2.2@-8.841,35.355 ; C2_LS1.1 3.128,43.338 U1_LS1.8 3.151,47.258 v1(3.206,47.313) 3.206,49.841 R3_LS1.2 ; S3.2 5.46,-59.31 7.62,-57.15 C2.1 ; R8_LS1.2@2.19,31.831 v1(2.19,33.597) R6_LS1.2@2.19,35.363 ; v1(4.699,-54.229) C2.1@7.581,-54.229 ; C2.1@7.702,-54.108 C1.1 ; RFReceiver.2 v1(31.75,-31.75) ; R8_LS4.2@25.412,10.16 v1(27.178,10.16) R6_LS4.2@28.944,10.16 ; U1_LS4.8@36.99,9.199 40.839,9.199 v1(40.894,9.144) 42.66,9.144 R3_LS4.2 ; U1_LS4.8@37.046,9.339 C2_LS4.1 ; R7.2 v1(40.005,-51.435)
  Bottom Layer w0.508: v1(-36.83,52.705) -34.29,50.165 v1(-34.29,40.64) v1(-34.29,27.94) -34.29,26.407 -35.02,25.677 -35.02,19.812 ; v1(-35.56,1.778) -40.386,1.778 -42.799,-0.635 ; v1(-34.798,15.494) -35.02,15.716 -35.02,19.812 ; v1(-19.939,-34.544) -19.939,-38.481 -12.954,-45.466 ; v1(-10.16,-23.622) -12.954,-20.828 ; v1(-10.16,1.778) -12.954,4.572 ; v1(-9.398,-9.906) -12.954,-6.35 ; v1(-9.398,15.494) -12.954,19.05 ; v1(-8.841,33.589) -12.954,37.702 ; v1@-8.833,33.597 v1(2.19,33.597) ; v1(-8.079,47.305) -10.939,50.165 ; v1(3.206,47.313) 0.354,50.165 -10.939,50.165 ; v1(27.178,10.16) 30.607,6.731 30.607,2.159 40.894,-8.128 ; v1(31.75,-31.75) 40.957,-40.957 ; v1(40.894,9.144) 40.894,-8.128 ; -42.799,-0.635 -42.799,12.033 -35.02,19.812 ; -42.799,-0.635 -42.799,-48.641 v1(-40.005,-51.435) -6.985,-51.435 ; -12.954,-45.466 -6.985,-51.435 ; -12.954,-45.466 -12.954,-20.828 ; -12.954,-20.828 -12.954,-6.35 ; -12.954,-6.35 -12.954,4.572 ; -12.954,4.572 -12.954,19.05 ; -12.954,19.05 -12.954,37.702 ; -12.954,37.702 -12.954,48.15 -10.939,50.165 ; -6.985,-51.435 -4.191,-54.229 v1(4.699,-54.229) 7.493,-51.435 v1(40.005,-51.435) 40.894,-50.546 40.894,-8.128
pads on no net: C1.0 J9.1 J9.2 J9.9 J9.10 J9.11 J9.17 J9.18 J9.19 J9.20 J9.21 J9.22 J9.23 J9.24 J9.26 J10.1 J10.3 J10.6 J10.9 J10.12 J10.13 J10.14 J10.15 J10.16 J10.18 J10.19 J10.23 J10.24 J10.25 J10.26

## Polygon pours and split planes (outlines as drawn)
GND on Bottom Layer "Top Layer-No Net" (solid, remove dead copper, pour order 2): -45.974,63.754 45.593,63.754 45.593,-88.773 -45.974,-88.773

## Keep-outs
Keep-Out Layer:
  lines w0.254: -45.72,-88.9 45.72,-88.9 45.72,63.5 -45.72,63.5 -45.72,-88.9

## Silkscreen, mask and mechanical layers (free items; w line width, h text height)
Top Overlay:
  text "D1" at -36.068,56.388 h1.52
  text "R5" at -40.513,50.165 h1.52
  text "S1" at -43.688,48.514 h1.52
  text "C2" at -11.176,42.926 h1.52 r90
  text "C2" at -1.143,40.767 h1.52
  text "S2" at -43.561,36.322 h1.52
  text "R7" at -3.81,36.068 h0.5
  text "R7" at 7.366,36.068 h0.5
  text "R6" at -7.747,34.163 h0.5
  text "R6" at 3.429,34.163 h0.5
  text "CS301" at 33.274,32.639 h7 r90
  text "GROUP 6" at 38.608,32.639 h7 r90
  text "GND" at -21.082,31.242 h1.02
  text "C1" at 6.477,31.242 h1.52
  text "VDIO" at 18.669,31.242 h1.02
  text "C1" at -4.699,31.115 h1.52
  text "3.0" at -21.082,28.702 h1.02
  text "GND" at 18.796,28.448 h1.02
  text "1.7" at 18.923,26.416 h1.02
  text "3.1" at -21.082,26.162 h1.02
  text "1.6" at 18.923,23.876 h1.02
  text "3.2" at -21.082,23.622 h1.02
  text "1.5" at 18.923,21.463 h1.02
  text "3.3" at -21.082,21.082 h1.02
  text "1.4" at 18.923,18.796 h1.02
  text "3.4" at -21.353,18.542 h1.02
  text "M2 D1" at 27.686,17.145 h1.52
  text "1.3" at 18.923,16.256 h1.02
  text "3.5" at -21.353,16.002 h1.02
  text "M2 D2" at 27.813,14.732 h1.52
  text "1.2" at 18.923,13.843 h1.02
  text "3.6" at -21.353,13.462 h1.02
  text "C2" at 36.703,12.319 h1.52
  text "1.1" at 18.923,11.176 h1.02
  text "C2" at -37.719,11.049 h1.52 r90
  text "C2" at -12.446,11.049 h1.52 r90
  text "3.7" at -21.353,10.922 h1.02
  text "1.0" at 18.923,8.636 h1.02
  text "15.0" at -21.48,8.382 h1.02
  text "R6" at 27.305,8.382 h0.5
  text "12.0" at 18.923,6.096 h1.02
  text "C1" at 22.352,6.096 h1.52
  text "15.1" at -21.353,5.842 h1.02
  text "R7" at -30.48,4.191 h0.5
  text "R7" at -4.953,4.191 h0.5
  text "R7" at 29.845,4.064 h0.5
  text "12.1" at 18.923,3.683 h1.02
  text "15.2" at -21.48,3.302 h1.02
  text "R6" at -34.417,2.413 h0.5
  text "R6" at -8.89,2.413 h0.5
  text "12.2" at 18.923,0.889 h1.02
  text "15.3" at -21.48,0.762 h1.02
  text "12.3" at 18.923,-1.524 h1.02
  text "15.4" at -21.48,-1.778 h1.02
  text "C1" at -7.747,-2.413 h1.52
  text "C1" at -33.274,-2.54 h1.52
  text "12.4" at 18.923,-4.064 h1.02
  text "15.5" at -21.209,-4.318 h1.02
  text "M2 EN" at 36.703,-5.588 h1.52
  text "12.5" at 18.923,-6.604 h1.02
  text "0.0" at -21.082,-6.858 h1.02
  text "12.6" at 18.923,-9.144 h1.02
  text "0.1" at -21.082,-9.398 h1.02
  text "Quad Enc" at -43.688,-10.795 h1.52
  text "IN1" at 40.894,-10.922 h1.52
  text "12.7" at 18.923,-11.684 h1.02
  text "0.2" at -21.082,-11.938 h1.02
  text "IN2" at 40.64,-13.208 h1.52
  text "2.7" at 18.923,-14.224 h1.02
  text "C2" at -12.446,-14.351 h1.52 r90
  text "0.3" at -21.082,-14.478 h1.02
  text "M1 IN2" at 29.083,-16.129 h1.52
  text "2.6" at 18.923,-16.764 h1.02
  text "0.4" at -21.082,-17.018 h1.02
  text "M1 IN1" at 29.21,-18.288 h1.52
  text "2.5" at 18.923,-19.304 h1.02
  text "0.5" at -21.082,-19.558 h1.02
  text "R7" at -5.08,-21.209 h0.5
  text "M1 EN" at 30.734,-21.336 h1.52
  text "2.4" at 18.923,-21.971 h1.02
  text "0.6" at -21.082,-22.098 h1.02
  text "R6" at -9.017,-22.987 h0.5
  text "D2" at 35.052,-23.622 h1.52
  text "2.3" at 18.923,-24.384 h1.02
  text "0.7" at -21.082,-24.638 h1.02
  text "D1" at 35.052,-25.908 h1.52
  text "2.2" at 18.923,-26.924 h1.02
  text "C1" at -8.001,-28.067 h1.52
  text "RST" at -20.828,-28.194 h1.02
  text "2.1" at 18.923,-29.464 h1.02
  text "GND" at -20.955,-29.591 h1.02
  text "2.0" at 18.923,-32.004 h1.02
  text "VDD" at -20.955,-32.131 h1.02
  text "R4" at -25.146,-35.433 h1.52 r90
  text "R3" at -21.082,-36.449 h1.52 r90
  text "RF Receiver" at 17.272,-37.592 h1.52
  text "BatteryIn" at -35.56,-38.735 h1.52 r90
  text "R2" at -25.781,-40.64 h1.52
  text "R1" at -30.607,-40.894 h1.52
  text "Supply" at -4.318,-42.545 h1.52
  text "BatteryOut" at -38.1,-48.26 h1.52
  text "C1" at 20.193,-50.419 h1.52
  text "R6" at -37.465,-54.991 h1.52 r90
  text "R7" at 38.862,-55.118 h1.52 r90
  text "C2" at 8.89,-56.515 h1.52
  text "LED_SW" at -11.684,-57.277 h1.52
  text "D2" at -36.068,-58.293 h1.52
  text "D3" at 34.036,-58.928 h1.52